# EAGLE board designfile (EAGLE 9.7.0)

Size 329.1 x 243.21 mm. Coordinates in mm from the lower left corner, seen from the top.
Outline: 0,0 329.1,0 329.1,243.21 0,243.21 0,0
Copper layers (1*16): Top 0.035mm / dielectric 1.5mm / Bottom 0.035mm
Design rules "default": minimum track width 6mil, minimum drill 0.35mm, track to track 6mil, track to pad 6mil, pad to pad 6mil, via to via 6mil, smd to smd 6mil, copper to edge 40mil, drill to drill 6mil, minimum pad ring 10mil, minimum via ring 8mil, stop-mask expansion 4mil, vias tented up to drill 0mil, thermal gap 10mil

## Footprints (pad centres in the part's own frame; a part is rotated, then mirrored left to right if it is on the bottom)
BATTERY-GENERIC = drill 1.118 pad 3.15 octagon: + 2.54,0; - -2.54,0
LEDRD254W60D565H860B = drill 0.981 pad 1.581: 1 -1.27,0; 2 1.27,0
LED-RGB-5MM = drill 0.9: B 0.635,0.635; C -0.635,-0.635; G 1.905,-0.635; R -1.905,0.635
MQ-XX-SOCKET = drill 1.27: 1 -6.223,6.223; 2 -8.788,0; 3 -6.223,-6.223; 4 6.223,-6.223; 5 8.788,0; 6 6.223,6.223
LU-5-R = drill 0.8: 1 -6.35,-3.81; 5 3.81,-3.81; 6 6.35,-3.81; 7 6.35,3.81; 8 3.81,3.81; 12 -6.35,3.81
MOTOR = drill 1.118 pad 3.15 octagon: + 2.54,0; - -2.54,0
PIEZO = drill 1 pad 1.6: 1 -3.5,0; 2 3.5,0
RESAD1016W63L850D250B = drill 0.83 pad 1.43: 1 -5.08,0; 2 5.08,0
GL5528 = drill 0.8 pad 1.4: 1 -1.702,0; 2 1.702,0
SWITCH-MOMENTARY-PTH-6.5MM = drill 1.016 pad 1.88: 1 -3.251,2.261; 2 3.251,2.261; 3 -3.251,-2.261; 4 3.251,-2.261
ARDUINO-UNO-R3-SHIELD = drill 1.016 pad 1.88: 3.3V 24.13,-2.54; 5V 24.13,0; A0 24.13,12.7; A1 24.13,15.24; A2 24.13,17.78; A3 24.13,20.32; A4 24.13,22.86; A5 24.13,25.4; AREF -24.13,-13.97; D2 -24.13,20.32; D3 -24.13,17.78; D4 -24.13,15.24; D5 -24.13,12.7; D6 -24.13,10.16; D7 -24.13,7.62; D8 -24.13,3.81; D9 -24.13,1.27; D10 -24.13,-1.27; D11 -24.13,-3.81; D12 -24.13,-6.35; D13 -24.13,-8.89; GND@0 24.13,2.54; GND@1 24.13,5.08; GND@2 -24.13,-11.43; IOREF 24.13,-7.62; NC 24.13,-10.16; RES 24.13,-5.08; RX -24.13,25.4; SCL -24.13,-19.05; SDA -24.13,-16.51; TX -24.13,22.86; VIN 24.13,7.62
JHD-162A = drill 1.016 long: 1 -19.05,0; 2 -16.51,0; 3 -13.97,0; 4 -11.43,0; 5 -8.89,0; 6 -6.35,0; 7 -3.81,0; 8 -1.27,0; 9 1.27,0; 10 3.81,0; 11 6.35,0; 12 8.89,0; 13 11.43,0; 14 13.97,0; 15 16.51,0; 16 19.05,0
TO92 = drill 0.813 octagon: 1 -1.27,0; 2 0,1.905; 3 1.27,0

## Placement (x,y rotation side)
BAT1  9V  [BATTERY-GENERIC]  272.11,234.96 0 top
D1  RED  [LEDRD254W60D565H860B]  208.15,85.18 180 top
D2  LED-RGBRCBG-PTH  [LED-RGB-5MM]  225.93,85.18 0 top
GAS1  GAS-SENSORMQ-XX-SOCKET  [MQ-XX-SOCKET]  288.16,73.75 270 top
K1  RELAY-SPDT_LU-5-R  [LU-5-R]  223.77,197.98 180 top
M1  MOTOR_HDR  [MOTOR]  245.38,225.94 0 top
PIEZO1  PIEZO  [PIEZO]  317.37,82.64 0 top
R1  220  [RESAD1016W63L850D250B]  151.47,90.24 270 top
R2  PHOTOCELL_GL5528  [GL5528]  266.57,82.64 0 top
R3  1k  [RESAD1016W63L850D250B]  35.51,18.8 0 top
R4  330  [RESAD1016W63L850D250B]  206.88,57.24 90 top
R5  330  [RESAD1016W63L850D250B]  224.66,57.24 90 top
R6  1k  [RESAD1016W63L850D250B]  45.67,16.26 0 top
R7  330  [RESAD1016W63L850D250B]  278,87.72 0 top
R8  100  [RESAD1016W63L850D250B]  311.02,75.02 90 top
R9  2.2k  [RESAD1016W63L850D250B]  267.84,57.24 90 top
R10  1k  [RESAD1016W63L850D250B]  50.75,23.88 270 top
S1  SWITCH_MOMENTARY  [SWITCH-MOMENTARY-PTH-6.5MM]  27.89,7.37 90 top
S2  SWITCH_MOMENTARY  [SWITCH-MOMENTARY-PTH-6.5MM]  38.05,7.37 90 top
S3  SWITCH_MOMENTARY  [SWITCH-MOMENTARY-PTH-6.5MM]  48.21,7.37 90 top
U1  ARDUINO-UNO-R3-SHIELD  [ARDUINO-UNO-R3-SHIELD]  47.88,75.13 270 top
U2  LCD-16X2JHD-162A  [JHD-162A]  132.76,42.61 0 top
U3  TMP36GT9Z_TO92  [TO92]  252.6,82.64 0 top

## Library data of the parts
BAT1 D2 GAS1 K1 M1 PIEZO1 R1-R10 S1-S3 U1-U3 = Tinkercad
D1 = Tinkercad; CATEGORY: Opto-Electronic; SUB-CATEGORY: LED; VALUE: LED_RED

## Nets
BAT1+: BAT1.+ K1.1 K1.12
BAT1-: BAT1.- M1.-
D1_C: D1.2 R4.2
D2_C: D2.C R5.2
M1_+: K1.6 M1.+
PIEZO1_1: PIEZO1.1 R8.2
S1_3: R3.1 S1.3 S1.4
S2_4: R3.2 R6.1 S2.3 S2.4
U1_5V: GAS1.4 GAS1.5 GAS1.6 R1.1 R2.1 R10.1 U1.5V U2.2 U3.3
U1_A0: R6.2 R10.2 S3.3 S3.4 U1.A0
U1_A1: R2.2 R9.2 U1.A1
U1_A2: U1.A2 U3.2
U1_A3: GAS1.1 GAS1.3 R7.2 U1.A3
U1_D2: U1.D2 U2.14
U1_D3: U1.D3 U2.13
U1_D4: U1.D4 U2.12
U1_D5: R8.1 U1.D5
U1_D6: D2.R U1.D6
U1_D7: U1.D7 U2.11
U1_D8: K1.5 U1.D8
U1_D9: D2.G U1.D9
U1_D10: D2.B U1.D10
U1_D11: U1.D11 U2.6
U1_D12: U1.D12 U2.4
U1_D13: D1.1 U1.D13
U1_GND: GAS1.2 K1.8 PIEZO1.2 R4.1 R5.1 R7.1 R9.1 S1.1 S1.2 S2.1 S2.2 S3.1 S3.2 U1.GND@0 U1.GND@1 U1.GND@2 U2.1 U2.3 U2.5 U2.16 U3.1
U2_LED+: R1.2 U2.15

## Tracks (layer width: path | path; a pad name or v marks a point on that pad's centre or on a via)
BAT1+  (2 unrouted)
BAT1-  (1 unrouted)
D1_C  (1 unrouted)
D2_C  (1 unrouted)
M1_+  (1 unrouted)
PIEZO1_1  (1 unrouted)
S1_3  (2 unrouted)
S2_4  (3 unrouted)
U1_5V  (8 unrouted)
U1_A0  (4 unrouted)
U1_A1  (2 unrouted)
U1_A2  (1 unrouted)
U1_A3  (3 unrouted)
U1_D2  (1 unrouted)
U1_D3  (1 unrouted)
U1_D4  (1 unrouted)
U1_D5  (1 unrouted)
U1_D6  (1 unrouted)
U1_D7  (1 unrouted)
U1_D8  (1 unrouted)
U1_D9  (1 unrouted)
U1_D10  (1 unrouted)
U1_D11  (1 unrouted)
U1_D12  (1 unrouted)
U1_D13  (1 unrouted)
U1_GND  (20 unrouted)
U2_LED+  (1 unrouted)